# Altium PCB PCB1.PcbDoc
Units mm, origin at the board's own origin, x right, y up, seen from the top; angles counter-clockwise.
Board outline 72.23 x 33.12 mm, 2 copper layers (Top Layer, Bottom Layer); 5 components, 5 nets, 11 pads, 2 vias.
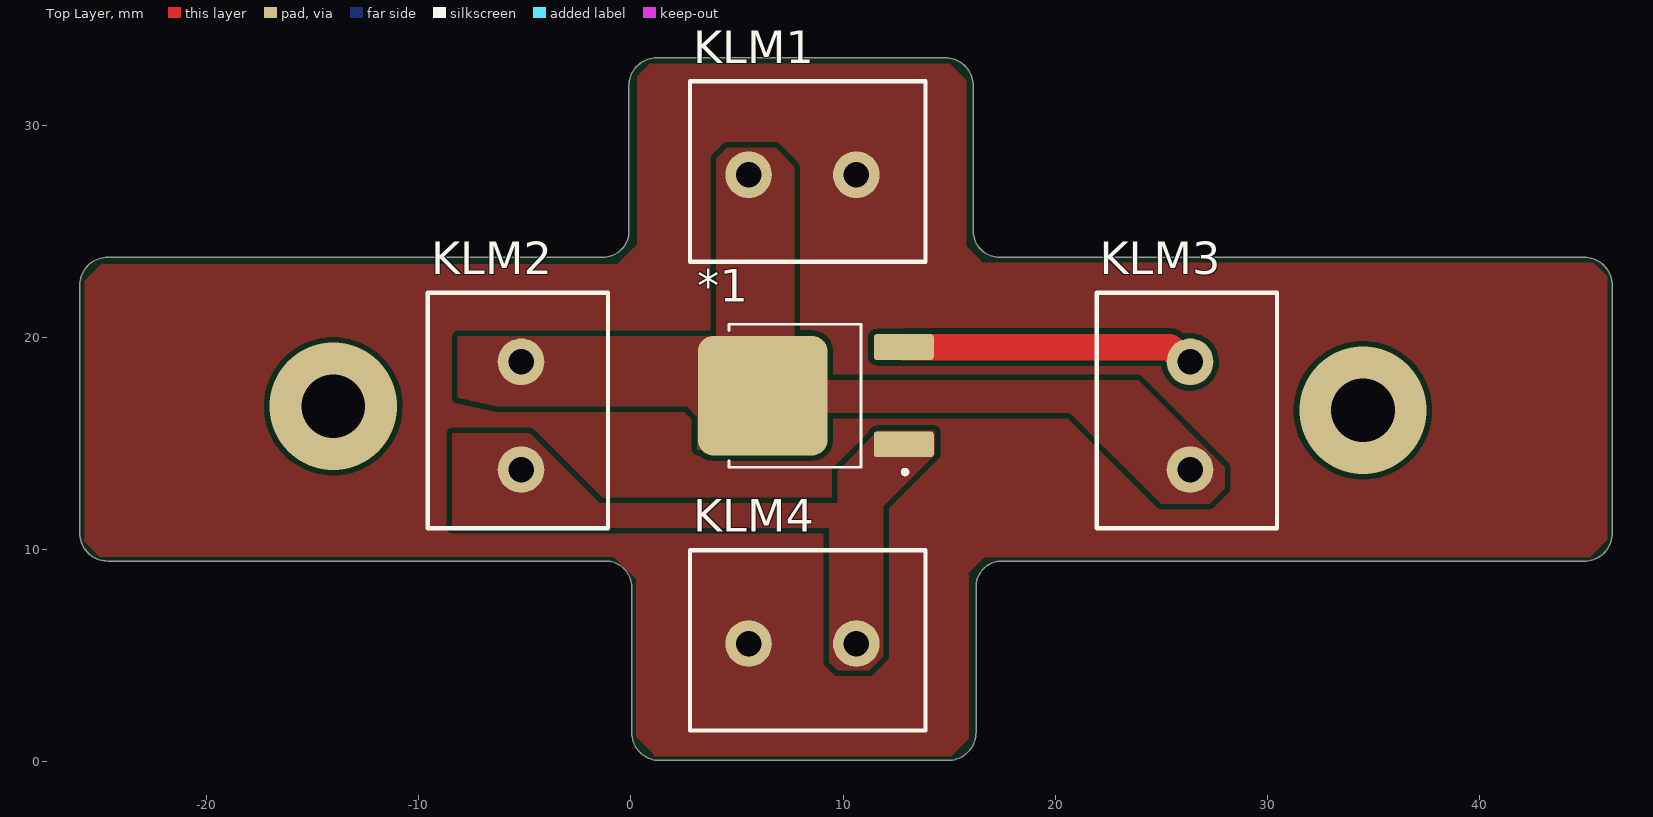
[diagram p0: Top Layer view]
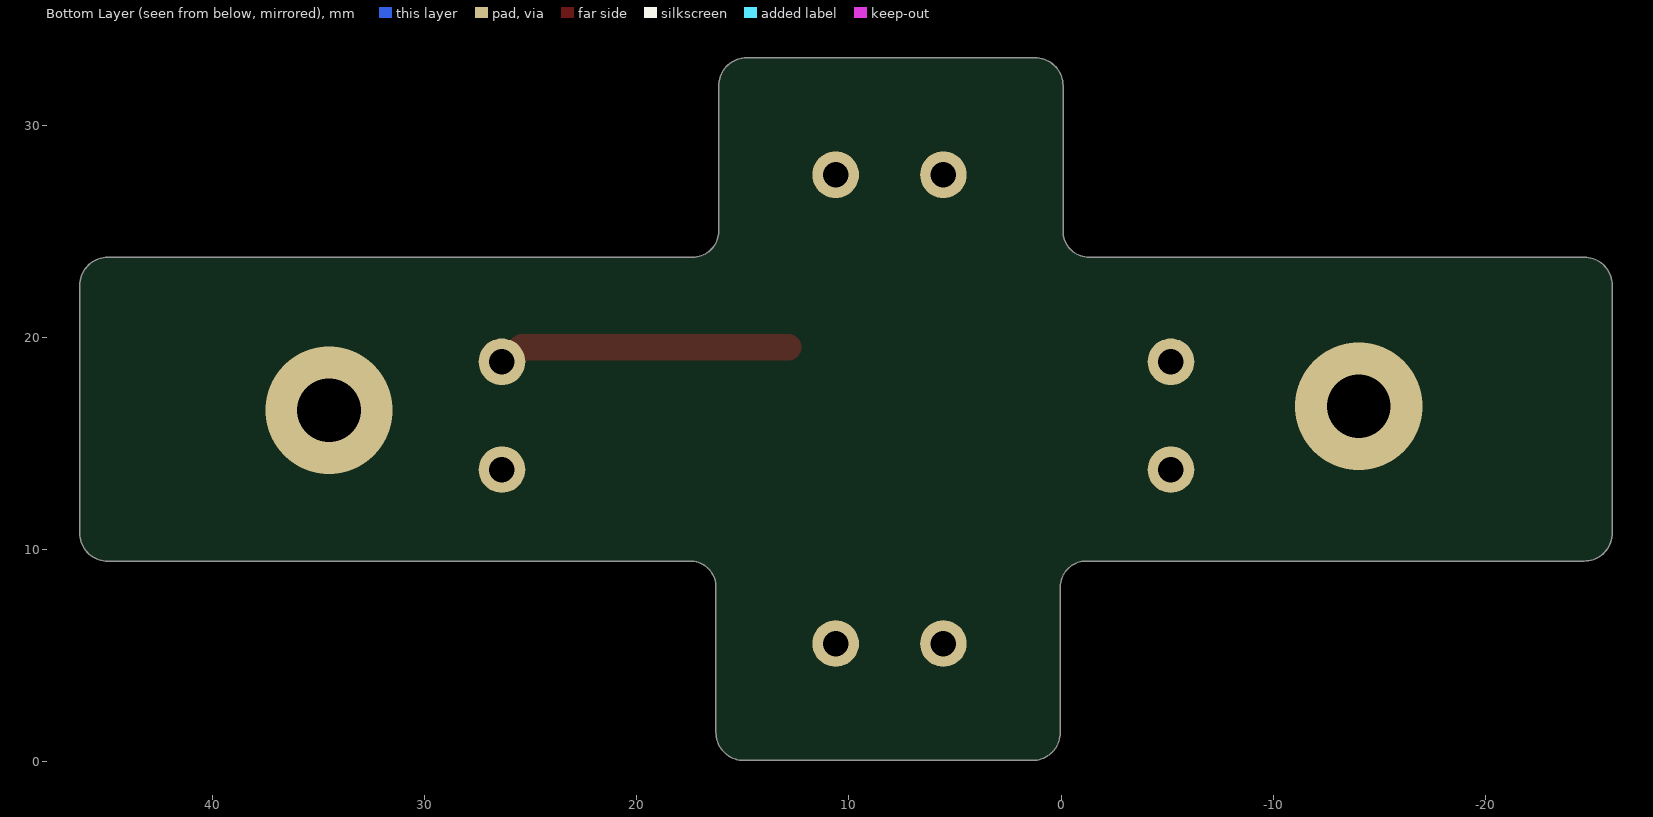
[diagram p1: Bottom Layer view, seen from below]
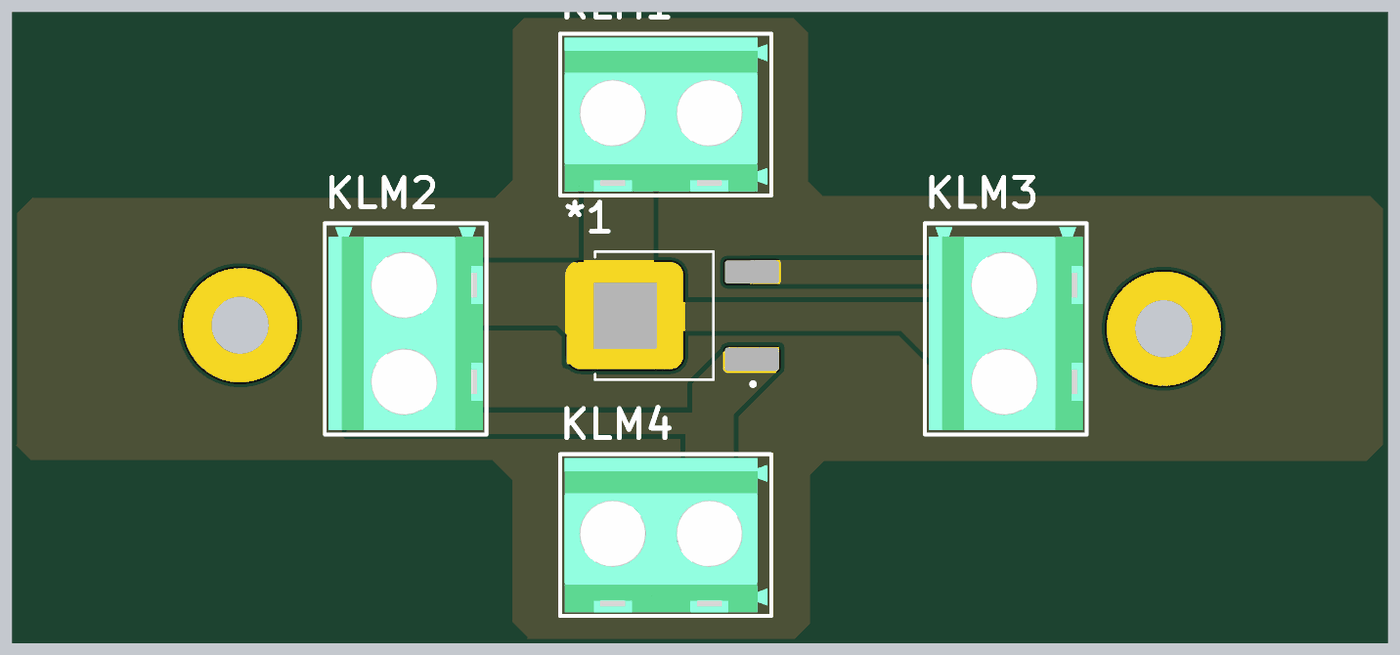
[diagram p2: 3D render of the assembled board from above, using the file's embedded part models]

## Layer stack, top to bottom
Top Solder: solder mask 0.0102, Solder Resist, Dk 3.5
Top Layer: signal copper 0.0356
Dielectric 1: dielectric 0.32, FR-4, Dk 4.8
Bottom Layer: signal copper 0.0356
Bottom Solder: solder mask 0.0102, Solder Resist, Dk 3.5

## Board outline
-21.743,9.468 -17.951,9.468 -1.187,9.468 cw(c-1.187,8.248) 0.033,8.248 0.033,1.39 ccw(c1.353,1.39) 1.353,0.07 14.942,0.07 ccw(c14.942,1.39) 16.262,1.39 16.262,8.248 cw(c17.482,8.248) 17.482,9.468 41.789,9.468 41.819,9.458 44.929,9.458 ccw(c44.929,10.778) 46.249,10.778 46.249,22.462 ccw(c44.929,22.462) 44.929,23.782 41.866,23.782 41.826,23.792 37.748,23.792 37.911,23.792 34.119,23.792 17.355,23.792 cw(c17.355,25.012) 16.135,25.012 16.135,31.87 ccw(c14.815,31.87) 14.815,33.19 1.226,33.19 ccw(c1.226,31.87) -0.094,31.87 -0.094,25.012 cw(c-1.314,25.012) -1.314,23.792 -24.659,23.792 ccw(c-24.659,22.472) -25.979,22.472 -25.979,10.788 ccw(c-24.659,10.788) -24.659,9.468

## Design rules (kind name [scope] priority, off if disabled: settings)
Clearance [All] p1: gap=0.254 ignorepadtopadclearanceinfootprint=FALSE except(0: Arc-Hole Track-Hole SMDPad-Hole THPad-Hole Via-Hole Fill-Hole Poly-Hole Region-Hole Text-Hole)
PolygonConnect [All] p1: connectstyle=Relief reliefconductorwidth=0.254 reliefentries=4 polygonreliefangle="90 Angle" airgapwidth=0.254
RoutingVias [All] p1: holewidth=0.711 width=1.27 viastyle="Through Hole" minholewidth=0.711 minwidth=1.27 maxholewidth=0.711 maxwidth=1.27
SolderMaskExpansion [All] p1: expansion=0.102 istentingtop=FALSE
Width [All] p1: maxlimit=2 minlimit=0.254 preferedwidth=0.254
30 further rules are at their usual default settings.

## Components (designator, comment, footprint, x,y, rotation, side; value= is the part's Value field where it differs from the comment)
*1 "CLA5UE" DPAK229P990X239-4N 8.719,17.265 r90 top
KLM1 "2 Pin Klemens" "5.08mm-2 pin" 8.084,27.679 r180 top
KLM2 "2 Pin Klemens" "5.08mm-2 pin" -5.18,16.32 r270 top
KLM3 "2 Pin Klemens" "5.08mm-2 pin" 26.35,16.32 r270 top
KLM4 "2 Pin Klemens" "5.08mm-2 pin" 8.084,5.581 r180 top

## Footprints (in the part's own frame and the unit in brackets; to place one, negate y for a bottom-side part, rotate by r counter-clockwise, add the part's x,y. Pads: shape width x height; smd on the part's side, far side on the other; paste and mask are expansions set on the pad)
"5.08mm-2 pin" [mm]
  round 2.2 hole 1.2 mask+0.05: 1(-2.54,0) 2(2.54,0)
  silkscreen extent -5.8,-4.4 5.3,4.1, body extent -5.59,-4.2 5.07,3.9, height 10.2
DPAK229P990X239-4N [mm]
  rrect25% 1.22x2.83 smd: 1(-2.29,-4.14) 3(2.29,-4.14)
  rrect25% 5.63x6.1 smd paste-4: 4(0,2.51)
  silkscreen extent -3.7,-4.3 3.37,4.1

## Part data
KLM1 KLM2 KLM3 KLM4: "5.08mm 2 pin klemens"

## Via types
v1: diameter 6, hole 3, Top Layer to Bottom Layer, 2 vias

## Nets (pads, with @x,y where several pads share a name; then routed paths per layer and width w, separated by ;. In a path a pad name is that pad's centre, name@x,y a point inside that pad or via, vN(x,y) a via of type N, cw(c..) or ccw(c..) an arc to the next point about the centre after c; other vN are vias at no path point)
GND: KLM1.1 KLM4.2
Net*1_3: 
NetKLM3_1: *1.3 KLM3.1 | length 13.8
  Top Layer w1.25: *1.3 25.398,19.555 26.093,18.86 KLM3.1
VCC: *1.4 KLM1.2 KLM2.1 KLM3.2
Vout: *1.1 KLM2.2 KLM4.1
copper on no net:
  other v1: 34.5,16.58 -14.03,16.76

## Polygon pours and split planes (outlines as drawn)
GND on Top Layer "GND_L01_P005" (solid, pour order 5): -25.74,22.68 -24.92,23.5 -24.88,23.46 -0.64,23.46 0.3,24.4 0.3,32.32 0.88,32.9 15.03,32.9 15.8,32.13 15.8,24.31 16.57,23.54 45.36,23.54 46.01,22.89 46.01,10.47 45.18,9.64 16.65,9.64 15.88,8.87 15.92,8.83 15.92,1.1 15.1,0.28 1.08,0.28 1.08,0.36 0.26,1.18 0.26,8.62 -0.8,9.68 -25.04,9.68 -25.82,10.46 -25.74,10.54 -25.74,21.23
VCC on Top Layer "VCC_L01_P004" (solid, pour order 4): 6.49,18.22 6.73,17.98 23.91,17.98 27.99,13.9 27.99,12.89 27.27,12.17 24.99,12.17 20.69,16.47 6.61,16.47 6.61,18.1 6.73,17.98 6.99,17.98
VCC on Top Layer "VCC_L01_P002" (solid, pour order 2): 4.02,28.441 4.528,28.949 6.814,28.949 7.703,28.06 7.703,19.17 4.274,19.17 3.893,19.551 4.02,19.678
VCC on Top Layer "VCC_L01_P000" (solid, pour order 0): -8.172,17.171 -6.34,16.757 2.623,16.757 3.131,16.249 3.131,14.725 4.401,14.725 4.528,14.598 4.655,14.725 4.655,20.059 -8.172,20.059 -8.807,20.694 -8.172,20.059
Vout on Top Layer "VOUT_L01_P001" (solid, pour order 1): 14.307,15.614 14.307,14.471 11.894,12.058 11.894,4.974 11.231,4.311 9.735,4.311 9.354,4.692 9.354,11.042 -8.426,11.042 -8.426,15.487 -4.767,15.487 -1.465,12.185 9.735,12.185 9.735,13.709 11.64,15.614 14.434,15.614

## Silkscreen, mask and mechanical layers (free items; w line width, h text height)
Mechanical 1:
  lines w0.1: -21.743,9.518 -17.951,9.518 -1.187,9.518 cw(c-1.187,8.248) 0.083,8.248 0.083,1.39 ccw(c1.353,1.39) 1.353,0.12 14.942,0.12 ccw(c14.942,1.39) 16.212,1.39 16.212,8.248 cw(c17.482,8.248) 17.482,9.518 33.992,9.518 34.057,9.518 37.717,9.518 40.827,9.518 41.795,9.518 cw(c41.795,9.484) 41.819,9.508 44.929,9.508 ccw(c44.929,10.778) 46.199,10.778 46.199,21.827 46.199,22.462 ccw(c44.929,22.462) 44.929,23.732 41.85,23.732 ccw(c41.826,23.708) 41.826,23.742 40.827,23.742 37.748,23.742 ; -21.58,9.518 -24.659,9.518 cw(c-24.659,10.788) -25.929,10.788 -25.929,11.423 -25.929,22.472 cw(c-24.659,22.472) -24.659,23.742 -21.549,23.742 -17.889,23.742 -17.824,23.742 -1.314,23.742 ccw(c-1.314,25.012) -0.044,25.012 -0.044,31.87 cw(c1.226,31.87) 1.226,33.14 14.815,33.14 cw(c14.815,31.87) 16.085,31.87 16.085,25.012 ccw(c17.355,25.012) 17.355,23.742 34.119,23.742 37.911,23.742